# EAGLE board Electric circuit (1) (EAGLE 9.7.0)

Size 241.89 x 188.41 mm. Coordinates in mm from the lower left corner, seen from the top.
Outline: 0,0 241.89,0 241.89,188.41 0,188.41 0,0
Copper layers (1*16): Top 0.035mm / dielectric 1.5mm / Bottom 0.035mm
Design rules "default": minimum track width 6mil, minimum drill 0.35mm, track to track 6mil, track to pad 6mil, pad to pad 6mil, via to via 6mil, smd to smd 6mil, copper to edge 40mil, drill to drill 6mil, minimum pad ring 10mil, minimum via ring 8mil, stop-mask expansion 4mil, vias tented up to drill 0mil, thermal gap 10mil

## Footprints (pad centres in the part's own frame; a part is rotated, then mirrored left to right if it is on the bottom)
BATTERY-GENERIC = drill 1.118 pad 3.15 octagon: + 2.54,0; - -2.54,0
DIODE-AXIAL = drill 1: 1 -5.08,0; 2 5.08,0
LEDRD254W60D565H860B = drill 0.981 pad 1.581: 1 -1.27,0; 2 1.27,0
DG01D = drill 1.118 pad 3.15 octagon: + 2.54,0; - -2.54,0
PIEZO = drill 1 pad 1.6: 1 -3.5,0; 2 3.5,0
28015 = drill 1.016 long: 1 -2.54,0; 2 0,0; 3 2.54,0
RESAD1016W63L850D250B = drill 0.83 pad 1.43: 1 -5.08,0; 2 5.08,0
DIP762W53P254L1969H508Q16B = drill 0.743 pad 1.343: 1 -3.81,8.89; 2 -3.81,6.35; 3 -3.81,3.81; 4 -3.81,1.27; 5 -3.81,-1.27; 6 -3.81,-3.81; 7 -3.81,-6.35; 8 -3.81,-8.89; 9 3.81,-8.89; 10 3.81,-6.35; 11 3.81,-3.81; 12 3.81,-1.27; 13 3.81,1.27; 14 3.81,3.81; 15 3.81,6.35; 16 3.81,8.89
ARDUINO-UNO-R3-SHIELD = drill 1.016 pad 1.88: 3.3V 24.13,-2.54; 5V 24.13,0; A0 24.13,12.7; A1 24.13,15.24; A2 24.13,17.78; A3 24.13,20.32; A4 24.13,22.86; A5 24.13,25.4; AREF -24.13,-13.97; D2 -24.13,20.32; D3 -24.13,17.78; D4 -24.13,15.24; D5 -24.13,12.7; D6 -24.13,10.16; D7 -24.13,7.62; D8 -24.13,3.81; D9 -24.13,1.27; D10 -24.13,-1.27; D11 -24.13,-3.81; D12 -24.13,-6.35; D13 -24.13,-8.89; GND@0 24.13,2.54; GND@1 24.13,5.08; GND@2 -24.13,-11.43; IOREF 24.13,-7.62; NC 24.13,-10.16; RES 24.13,-5.08; RX -24.13,25.4; SCL -24.13,-19.05; SDA -24.13,-16.51; TX -24.13,22.86; VIN 24.13,7.62

## Placement (x,y rotation side)
BAT2  6V  [BATTERY-GENERIC]  142.87,180.15 180 top
D1  DIODEDIODE-AXIAL  [DIODE-AXIAL]  98.28,112.01 90 top
D2  RED  [LEDRD254W60D565H860B]  98.28,92.96 90 top
D3  DIODEDIODE-AXIAL  [DIODE-AXIAL]  121.14,112.01 90 top
M2  MOTOR_DG01D  [DG01D]  67.53,28.33 90 top
M3  MOTOR_DG01D  [DG01D]  167.59,101.58 90 top
PIEZO1  PIEZO  [PIEZO]  105.9,72.64 270 top
PING1  DISTANCE-SENSOR-3PIN  [28015]  20.92,26.04 270 top
R1  1k  [RESAD1016W63L850D250B]  95.74,86.61 90 top
R2  1k  [RESAD1016W63L850D250B]  6.33,42.96 90 top
U1  L293E  [DIP762W53P254L1969H508Q16B]  109.71,108.2 0 top
U2  ARDUINO-UNO-R3-SHIELD  [ARDUINO-UNO-R3-SHIELD]  36.56,89.47 180 top

## Library data of the parts
BAT2 D1 D3 M2 M3 PIEZO1 PING1 R1 R2 U1 U2 = Tinkercad
D2 = Tinkercad; CATEGORY: Opto-Electronic; SUB-CATEGORY: LED; VALUE: LED_RED

## Nets
BAT2+: BAT2.+ D3.2 U1.8 U1.9 U1.16
BAT2-: BAT2.- D1.1 D2.2 D3.1 PIEZO1.2 PING1.1 R2.2 U1.4 U1.5 U1.12 U1.13 U2.GND@0 U2.GND@1 U2.GND@2
D2_A: D2.1 R1.2
M2_+: M2.+ U1.3
M2_-: M2.- U1.6
M3_+: M3.+ U1.14
M3_-: M3.- U1.11
U2_5V: D1.2 PING1.2 U1.1 U2.5V U2.D6
U2_D4: PING1.3 R2.1 U2.D4
U2_D5: PIEZO1.1 U2.D5
U2_D7: U1.10 U2.D7
U2_D8: U1.7 U2.D8
U2_D12: U1.2 U2.D12
U2_D13: U1.15 U2.D13

## Tracks (layer width: path | path; a pad name or v marks a point on that pad's centre or on a via)
BAT2+  (4 unrouted)
BAT2-  (13 unrouted)
D2_A  (1 unrouted)
M2_+  (1 unrouted)
M2_-  (1 unrouted)
M3_+  (1 unrouted)
M3_-  (1 unrouted)
U2_5V  (4 unrouted)
U2_D4  (2 unrouted)
U2_D5  (1 unrouted)
U2_D7  (1 unrouted)
U2_D8  (1 unrouted)
U2_D12  (1 unrouted)
U2_D13  (1 unrouted)